# EAGLE board CT_schematic (EAGLE 7.6.0)

Size 100 x 80 mm. Coordinates in mm from the lower left corner, seen from the top.
Outline: 0,0 100,0 100,80 0,80 0,0
Copper layers (1*16): Top 0.035mm / dielectric 1.5mm / Bottom 0.035mm
Design rules "default": minimum track width 10mil, minimum drill 24mil, track to track 8mil, track to pad 8mil, pad to pad 8mil, via to via 8mil, smd to smd 8mil, copper to edge 40mil, drill to drill 8mil, minimum pad ring 10mil, minimum via ring 8mil, stop-mask expansion 4mil, vias tented up to drill 0mil, thermal gap 10mil

## Footprints (pad centres in the part's own frame; a part is rotated, then mirrored left to right if it is on the bottom)
C0603 = smd 0.8 x 0.8: 1 -0.762,0; 2 0.762,0
C0402 = smd 0.5 x 0.5: 1 -0.508,0; 2 0.508,0
C1210 = smd 1.2 x 2.5: 1 -1.524,0; 2 1.524,0
C0805 = smd 1.2 x 1.3: 1 -1.016,0; 2 1.016,0
C1206 = smd 1.3 x 1.6: 1 -1.524,0; 2 1.524,0
EXV-9H = smd 3.505 x 1.676: 1 -2.857,0; 2 2.857,0
L0603 = smd 0.8 x 0.8: 1 -0.762,0; 2 0.762,0
R0603 = smd 0.8 x 0.8: 1 -0.762,0; 2 0.762,0
DR1040 = smd 1.6 x 3.2: 1 -4.458,0; 2 4.458,0
PJ-037B_PACKAGE = drill 3.7 square: 1 12,0 | drill 3.2 square: 2 6,0
LQFP176 = smd 0.3 x 1.2: 1 -10.75,-12.75; 2 -10.25,-12.75; 3 -9.75,-12.75; 4 -9.25,-12.75; 5 -8.75,-12.75; 6 -8.25,-12.75; 7 -7.75,-12.75; 8 -7.25,-12.75; 9 -6.75,-12.75; 10 -6.25,-12.75; 11 -5.75,-12.75; 12 -5.25,-12.75; 13 -4.75,-12.75; 14 -4.25,-12.75; 15 -3.75,-12.75; 16 -3.25,-12.75; 17 -2.75,-12.75; 18 -2.25,-12.75; 19 -1.75,-12.75; 20 -1.25,-12.75; 21 -0.75,-12.75; 22 -0.25,-12.75; 23 0.25,-12.75; 24 0.75,-12.75; 25 1.25,-12.75; 26 1.75,-12.75; 27 2.25,-12.75; 28 2.75,-12.75; 29 3.25,-12.75; 30 3.75,-12.75; 31 4.25,-12.75; 32 4.75,-12.75; 33 5.25,-12.75; 34 5.75,-12.75; 35 6.25,-12.75; 36 6.75,-12.75; 37 7.25,-12.75; 38 7.75,-12.75; 39 8.25,-12.75; 40 8.75,-12.75; 41 9.25,-12.75; 42 9.75,-12.75; 43 10.25,-12.75; 44 10.75,-12.75; 89 10.75,12.75; 90 10.25,12.75; 91 9.75,12.75; 92 9.25,12.75; 93 8.75,12.75; 94 8.25,12.75; 95 7.75,12.75; 96 7.25,12.75; 97 6.75,12.75; 98 6.25,12.75; 99 5.75,12.75; 100 5.25,12.75; 101 4.75,12.75; 102 4.25,12.75; 103 3.75,12.75; 104 3.25,12.75; 105 2.75,12.75; 106 2.25,12.75; 107 1.75,12.75; 108 1.25,12.75; 109 0.75,12.75; 110 0.25,12.75; 111 -0.25,12.75; 112 -0.75,12.75; 113 -1.25,12.75; 114 -1.75,12.75; 115 -2.25,12.75; 116 -2.75,12.75; 117 -3.25,12.75; 118 -3.75,12.75; 119 -4.25,12.75; 120 -4.75,12.75; 121 -5.25,12.75; 122 -5.75,12.75; 123 -6.25,12.75; 124 -6.75,12.75; 125 -7.25,12.75; 126 -7.75,12.75; 127 -8.25,12.75; 128 -8.75,12.75; 129 -9.25,12.75; 130 -9.75,12.75; 131 -10.25,12.75; 132 -10.75,12.75 | smd 1.2 x 0.3: 45 12.75,-10.75; 46 12.75,-10.25; 47 12.75,-9.75; 48 12.75,-9.25; 49 12.75,-8.75; 50 12.75,-8.25; 51 12.75,-7.75; 52 12.75,-7.25; 53 12.75,-6.75; 54 12.75,-6.25; 55 12.75,-5.75; 56 12.75,-5.25; 57 12.75,-4.75; 58 12.75,-4.25; 59 12.75,-3.75; 60 12.75,-3.25; 61 12.75,-2.75; 62 12.75,-2.25; 63 12.75,-1.75; 64 12.75,-1.25; 65 12.75,-0.75; 66 12.75,-0.25; 67 12.75,0.25; 68 12.75,0.75; 69 12.75,1.25; 70 12.75,1.75; 71 12.75,2.25; 72 12.75,2.75; 73 12.75,3.25; 74 12.75,3.75; 75 12.75,4.25; 76 12.75,4.75; 77 12.75,5.25; 78 12.75,5.75; 79 12.75,6.25; 80 12.75,6.75; 81 12.75,7.25; 82 12.75,7.75; 83 12.75,8.25; 84 12.75,8.75; 85 12.75,9.25; 86 12.75,9.75; 87 12.75,10.25; 88 12.75,10.75; 133 -12.75,10.75; 134 -12.75,10.25; 135 -12.75,9.75; 136 -12.75,9.25; 137 -12.75,8.75; 138 -12.75,8.25; 139 -12.75,7.75; 140 -12.75,7.25; 141 -12.75,6.75; 142 -12.75,6.25; 143 -12.75,5.75; 144 -12.75,5.25; 145 -12.75,4.75; 146 -12.75,4.25; 147 -12.75,3.75; 148 -12.75,3.25; 149 -12.75,2.75; 150 -12.75,2.25; 151 -12.75,1.75; 152 -12.75,1.25; 153 -12.75,0.75; 154 -12.75,0.25; 155 -12.75,-0.25; 156 -12.75,-0.75; 157 -12.75,-1.25; 158 -12.75,-1.75; 159 -12.75,-2.25; 160 -12.75,-2.75; 161 -12.75,-3.25; 162 -12.75,-3.75; 163 -12.75,-4.25; 164 -12.75,-4.75; 165 -12.75,-5.25; 166 -12.75,-5.75; 167 -12.75,-6.25; 168 -12.75,-6.75; 169 -12.75,-7.25; 170 -12.75,-7.75; 171 -12.75,-8.25; 172 -12.75,-8.75; 173 -12.75,-9.25; 174 -12.75,-9.75; 175 -12.75,-10.25; 176 -12.75,-10.75
QFN-32 = smd 0.6 x 0.3: 1 -2.3,1.75; 2 -2.3,1.25; 3 -2.3,0.75; 4 -2.3,0.25; 5 -2.3,-0.25; 6 -2.3,-0.75; 7 -2.3,-1.25; 8 -2.3,-1.75; 17 2.3,-1.75; 18 2.3,-1.25; 19 2.3,-0.75; 20 2.3,-0.25; 21 2.3,0.25; 22 2.3,0.75; 23 2.3,1.25; 24 2.3,1.75 | smd 0.3 x 0.6: 9 -1.75,-2.3; 10 -1.25,-2.3; 11 -0.75,-2.3; 12 -0.25,-2.3; 13 0.25,-2.3; 14 0.75,-2.3; 15 1.25,-2.3; 16 1.75,-2.3; 25 1.75,2.3; 26 1.25,2.3; 27 0.75,2.3; 28 0.25,2.3; 29 -0.25,2.3; 30 -0.75,2.3; 31 -1.25,2.3; 32 -1.75,2.3 | smd 3.2 x 3.2: EXP 0,0
7498011122R = smd 0.71 x 2.29: 1 -3.545,-3.18; 2 -2.525,-3.18; 3 -1.505,-3.18; 4 -0.485,-3.18; 5 0.535,-3.18; 6 1.555,-3.18; 8 3.595,-3.18; 9 5.635,-3.18; 10 6.655,-3.18; 11 -6.605,-3.18; 12 -5.585,-3.18 | smd 1.4 x 2.54: 13 -8.51,10.2; 14 8.51,10.2 | hole 1.4: -3.5,0; 3.5,0
SOT-23-8 = smd 0.4 x 1.2: 1 -0.975,-1.3; 2 -0.325,-1.3; 3 0.325,-1.3; 4 0.975,-1.3; 5 0.975,1.3; 6 0.325,1.3; 7 -0.325,1.3; 8 -0.975,1.3
182-009-MALE = drill 1.194 pad 1.524 octagon: 1 -5.537,10.923; 2 -2.769,10.923; 3 0,10.923; 4 2.769,10.923; 5 5.537,10.923; 6 -4.153,8.08; 7 -1.384,8.08; 8 1.384,8.08; 9 4.153,8.08 | hole 3.048: -12.446,9.501; 12.446,9.501
DFN8-S = smd 0.6 x 0.4: 1 -2.69,1.905; 2 -2.69,0.635; 3 -2.69,-0.635; 4 -2.69,-1.905; 5 2.69,-1.905; 6 2.69,-0.635; 7 2.69,0.635; 8 2.69,1.905
ASEK = smd 1.4 x 1: 1 -1.1,-0.8; 2 1.1,-0.8; 3 1.1,0.8; 4 -1.1,0.8
ASFL1 = smd 1.7 x 1.5: 1 -1.27,-1.1; 2 1.27,-1.1; 3 1.27,1.1; 4 -1.27,1.1
IDT74FCT38072 = smd 0.51 x 1: 1 0,0; 2 1.27,0; 3 2.54,0; 4 3.81,0; 5 3.81,4.95; 6 2.54,4.95; 7 1.27,4.95; 8 0,4.95
WSON-8 = smd 0.3 x 0.6: 1 -0.75,0; 2 0.05,0; 3 0.85,0; 4 1.65,0; 5 1.65,3.8; 6 0.85,3.8; 7 0.05,3.8; 8 -0.75,3.8 | smd 3 x 2.6: PAD 0.45,1.9
HTSSOP14 = smd 1.676 x 0.356: 1 -2.8,1.95; 2 -2.8,1.3; 3 -2.8,0.65; 4 -2.8,0; 5 -2.8,-0.65; 6 -2.8,-1.3; 7 -2.8,-1.95; 8 2.8,-1.95; 9 2.8,-1.3; 10 2.8,-0.65; 11 2.8,0; 12 2.8,0.65; 13 2.8,1.3; 14 2.8,1.95 | smd 3 x 5: 15 0,0 | drill 0.4 pad 0.45: P$1 -0.75,1.5; P$2 0.75,1.5; P$3 -0.75,0; P$4 0.8,0; P$5 -0.75,-1.5; P$6 0.9,-1.5
SON-6 = smd 0.55 x 0.3: 1 -0.355,0.5 | smd 0.52 x 0.3: 2 -0.37,0; 3 -0.37,-0.5; 4 0.37,-0.5; 5 0.37,0; 6 0.37,0.5
SW_4-1437565-2 = smd 1.4 x 2.1: 1 -2.23,4.55; 2 -2.23,-4.55; 3 2.23,4.55; 4 2.23,-4.55
LGM67K-G1J2-24-Z = smd 0.8 x 1.4: A -2,0; C 0,0
NC7SZ125M5X = smd 1.3 x 0.7: 1 -1.3,0.95; 2 -1.3,0; 3 -1.3,-0.95; 4 1.3,-0.95; 5 1.3,0.95

## Placement (x,y rotation side)
C1  1e-06  [C0603]  -54.61,85.09 0 top  (outside the outline)
C2  1e-07  [C0603]  -58.42,85.09 0 top  (outside the outline)
C3  1e-07  [C0603]  -62.23,85.09 0 top  (outside the outline)
C4  1e-07  [C0603]  -66.04,85.09 0 top  (outside the outline)
C5  1e-07  [C0603]  -69.85,85.09 0 top  (outside the outline)
C6  1e-07  [C0603]  -73.66,85.09 0 top  (outside the outline)
C7  1e-07  [C0603]  -77.47,85.09 0 top  (outside the outline)
C8  1e-07  [C0603]  -81.28,85.09 0 top  (outside the outline)
C9  1e-07  [C0603]  -85.09,85.09 0 top  (outside the outline)
C10  1e-07  [C0603]  -15.24,90.17 0 top  (outside the outline)
C11  1e-07  [C0603]  -19.05,90.17 0 top  (outside the outline)
C12  1e-07  [C0603]  -22.86,90.17 0 top  (outside the outline)
C13  1e-07  [C0603]  -26.67,90.17 0 top  (outside the outline)
C14  1e-07  [C0603]  -30.48,90.17 0 top  (outside the outline)
C15  1e-07  [C0603]  -34.29,90.17 0 top  (outside the outline)
C16  1e-07  [C0603]  -38.1,90.17 0 top  (outside the outline)
C17  1e-07  [C0603]  -41.91,90.17 0 top  (outside the outline)
C18  4.7e-06  [C0603]  -39.37,85.09 0 top  (outside the outline)
C19  2.2e-06  [C0603]  -43.18,85.09 0 top  (outside the outline)
C20  2.2e-06  [C0603]  -46.99,85.09 0 top  (outside the outline)
C21  1e-08  [C0603]  -45.72,90.17 0 top  (outside the outline)
C22  1e-06  [C0603]  -49.53,90.17 0 top  (outside the outline)
C23  2.2e-08  [C0402]  -73.66,95.25 0 top  (outside the outline)
C24  1e-06  [C0603]  -53.34,90.17 0 top  (outside the outline)
C25  1e-06  [C0603]  -57.15,90.17 0 top  (outside the outline)
C26  4.7e-10  [C0603]  -50.8,85.09 0 top  (outside the outline)
C27  1e-06  [C0603]  -60.96,90.17 0 top  (outside the outline)
C28  1e-07  [C0402]  -81.28,95.25 0 top  (outside the outline)
C29  1e-08  [C0402]  -85.09,95.25 0 top  (outside the outline)
C30  1e-08  [C0402]  -88.9,95.25 0 top  (outside the outline)
C31  1e-08  [C0402]  -15.24,100.33 0 top  (outside the outline)
C32  1e-08  [C0402]  -19.05,100.33 0 top  (outside the outline)
C33  1e-08  [C0402]  -22.86,100.33 0 top  (outside the outline)
C34  1e-05  [C1210]  -29.21,73.66 0 top  (outside the outline)
C35  1e-05  [C0805]  -77.47,73.66 0 top  (outside the outline)
C36  1e-06  [C0603]  -64.77,90.17 0 top  (outside the outline)
C37  3.3e-09  [C0402]  -77.47,95.25 0 top  (outside the outline)
C38  1e-07  [C0402]  -26.67,100.33 0 top  (outside the outline)
C39  2.2e-05  [C1210]  -35.56,73.66 0 top  (outside the outline)
C40  2.2e-05  [C1210]  -41.91,73.66 0 top  (outside the outline)
C41  1e-05  [C1206]  -48.26,73.66 0 top  (outside the outline)
C42  1e-05  [C1206]  -54.61,73.66 0 top  (outside the outline)
C43  1e-07  [C0402]  -30.48,100.33 0 top  (outside the outline)
C44  0.0001  [EXV-9H]  -55.88,66.04 0 top  (outside the outline)
C45  0.0001  [EXV-9H]  -67.31,66.04 0 top  (outside the outline)
C46  1e-08  [C0402]  -34.29,100.33 0 top  (outside the outline)
C47  1e-08  [C0402]  -38.1,100.33 0 top  (outside the outline)
F1  240.0  [L0603]  -68.58,90.17 0 top  (outside the outline)
I1  97.0  [R0603]  -72.39,90.17 0 top  (outside the outline)
I5  5.2e-06  [DR1040]  -19.05,55.88 0 top  (outside the outline)
J1  PJ-037B  [PJ-037B_PACKAGE]  -67.31,35.56 0 top  (outside the outline)
R2  1000.0  [R0603]  -76.2,90.17 0 top  (outside the outline)
R4  4700.0  [R0603]  -80.01,90.17 0 top  (outside the outline)
R5  4700.0  [R0603]  -83.82,90.17 0 top  (outside the outline)
R6  2200.0  [R0603]  -87.63,90.17 0 top  (outside the outline)
R7  2200.0  [R0603]  -15.24,95.25 0 top  (outside the outline)
R8  2200.0  [R0603]  -19.05,95.25 0 top  (outside the outline)
R9  2200.0  [R0603]  -22.86,95.25 0 top  (outside the outline)
R10  10000.0  [R0603]  -35.56,80.01 0 top  (outside the outline)
R11  0.1  [R0603]  -26.67,95.25 0 top  (outside the outline)
R12  0.1  [R0603]  -30.48,95.25 0 top  (outside the outline)
R13  200.0  [R0603]  -34.29,95.25 0 top  (outside the outline)
R14  200.0  [R0603]  -38.1,95.25 0 top  (outside the outline)
R15  12100.0  [R0603]  -40.64,80.01 0 top  (outside the outline)
R16  49.9  [R0603]  -41.91,95.25 0 top  (outside the outline)
R17  49.9  [R0603]  -45.72,95.25 0 top  (outside the outline)
R18  49.9  [R0603]  -49.53,95.25 0 top  (outside the outline)
R19  10000.0  [R0603]  -45.72,80.01 0 top  (outside the outline)
R20  49.9  [R0603]  -53.34,95.25 0 top  (outside the outline)
R21  10000.0  [R0603]  -50.8,80.01 0 top  (outside the outline)
R22  10000.0  [R0603]  -55.88,80.01 0 top  (outside the outline)
R23  10000.0  [R0603]  -60.96,80.01 0 top  (outside the outline)
R24  10000.0  [R0603]  -66.04,80.01 0 top  (outside the outline)
R25  10000.0  [R0603]  -71.12,80.01 0 top  (outside the outline)
R26  10000.0  [R0603]  -76.2,80.01 0 top  (outside the outline)
R27  10000.0  [R0603]  -81.28,80.01 0 top  (outside the outline)
R28  120.0  [R0603]  -57.15,95.25 0 top  (outside the outline)
R29  100000.0  [R0603]  -15.24,80.01 0 top  (outside the outline)
R30  10000.0  [R0603]  -86.36,80.01 0 top  (outside the outline)
R31  10000.0  [R0603]  -15.24,85.09 0 top  (outside the outline)
R32  10000.0  [R0603]  -20.32,85.09 0 top  (outside the outline)
R33  100000.0  [R0603]  -20.32,80.01 0 top  (outside the outline)
R34  200.0  [R0603]  -60.96,95.25 0 top  (outside the outline)
R35  1000.0  [R0603]  -64.77,95.25 0 top  (outside the outline)
R36  71007.101651032  [R0603]  -86.36,73.66 0 top  (outside the outline)
R37  22000.0  [R0603]  -25.4,85.09 0 top  (outside the outline)
R38  10000.0  [R0603]  -30.48,85.09 0 top  (outside the outline)
R39  10000.0  [R0603]  -35.56,85.09 0 top  (outside the outline)
R40  9100.0  [R0603]  -68.58,95.25 0 top  (outside the outline)
R41  680000.0  [R0603]  -25.4,80.01 0 top  (outside the outline)
R42  120000.0  [R0603]  -30.48,80.01 0 top  (outside the outline)
U1  STM32F217IET6  [LQFP176]  -45.72,13.97 0 top  (outside the outline)
U2  LAN8710AI-EZK  [QFN-32]  -46.99,55.88 0 top  (outside the outline)
U3  7498011122R  [7498011122R]  -22.86,7.62 0 top  (outside the outline)
U4  MAX3051EKA+T  [SOT-23-8]  -59.69,72.39 0 top  (outside the outline)
U5  182-009-113R531  [182-009-MALE]  -36.83,34.29 0 top  (outside the outline)
U6  24AA512-I/MF  [DFN8-S]  -34.29,55.88 0 top  (outside the outline)
U7  ASEK-32.768KHz-ECST  [ASEK]  -46.99,66.04 0 top  (outside the outline)
U8  ASFL1-25MHZ-NCS  [ASFL1]  -85.09,54.61 0 top  (outside the outline)
U9  idt74fct38072  [IDT74FCT38072]  -29.21,63.5 0 top  (outside the outline)
U10  LP3878SDX-ADJ/NOPB  [WSON-8]  -68.58,53.34 0 top  (outside the outline)
U11  tps54325PWP  [HTSSOP14]  -77.47,64.77 0 top  (outside the outline)
U12  TPS3895ADRYR  [SON-6]  -40.64,99.06 0 top  (outside the outline)
U13  4-1437565-2  [SW_4-1437565-2]  -83.82,34.29 0 top  (outside the outline)
U14  Q65110A2395  [LGM67K-G1J2-24-Z]  -17.78,73.66 0 top  (outside the outline)
U15  nc7sz125m5x  [NC7SZ125M5X]  -64.77,72.39 0 top  (outside the outline)
U16  nc7sz125m5x  [NC7SZ125M5X]  -71.12,72.39 0 top  (outside the outline)

## Library data of the parts
C1-C47 F1 I1 I5 J1 R2 R4-R42 U1-U16 = circuit_tree

## Nets
CLK_U1_9: U1.9 U7.3
CLK_U1_29: U1.29 U9.7
CLK_U2_5: U2.5 U9.6
CLK_U9_3: U8.3 U9.3
GND: C1.2 C2.2 C3.2 C4.2 C5.2 C6.2 C7.2 C8.2 C9.2 C10.2 C11.2 C12.2 C13.2 C14.2 C15.2 C16.2 C17.2 C18.2 C19.2 C20.2 C21.2 C22.2 C23.2 C24.2 C25.2 C26.2 C27.2 C28.2 C29.2 C30.2 C31.2 C32.2 C33.2 C34.2 C35.2 C36.2 C37.2 C39.2 C40.2 C41.2 C42.2 C43.2 C44.2 C45.2 C46.2 C47.2 J1.2 R2.2 R10.2 R11.2 R12.2 R13.2 R15.2 R26.2 R27.2 R29.2 R31.2 R32.2 R35.2 R37.2 R40.2 R42.2 U1.14 U1.22 U1.37 U1.48 U1.61 U1.71 U1.90 U1.102 U1.113 U1.126 U1.135 U1.148 U1.158 U2.EXP U4.2 U5.5 U6.4 U6.7 U7.2 U8.2 U9.4 U9.5 U9.8 U10.3 U10.PAD U11.5 U11.8 U11.9 U11.15 U12.2 U14.C U15.1 U15.3 U16.1 U16.3
NET_U1_31: R5.1 U1.31 U16.4
NET_U1_33: R8.1 U1.33 U2.17
NET_U1_39: C21.1 C22.1 F1.1 U1.38 U1.39
NET_U1_42: R9.1 U1.42 U2.16
NET_U1_81: C19.1 U1.81
NET_U1_125: C20.1 U1.125
NET_U1_164: R6.1 U1.164 U6.6
NET_U1_165: R7.1 U1.165 U6.5
NET_U1_166: R10.1 U1.166
NET_U1_175: U14.A
NET_U1_176: U13.3 U13.4
NET_U2_1: C24.1 I1.1 R16.2 R17.2 R18.2 R20.2 R21.2 U2.1 U2.27 U3.2 U3.9
NET_U2_3: R21.1 U2.3
NET_U2_18: R19.1 U2.18
NET_U2_19: R4.1 U2.19 U15.4
NET_U2_32: R15.1 U2.32
NET_U3_1: R16.1 U2.29 U3.1
NET_U3_3: R14.2 R17.1 U2.28 U3.3
NET_U3_4: R18.1 U2.31 U3.4
NET_U3_5: C23.1 U3.2 U3.5
NET_U3_6: R20.1 U2.30 U3.6
NET_U3_8: R12.1 U3.8
NET_U3_10: R14.1 U3.10
NET_U3_11: U2.2 U3.11
NET_U3_12: R13.1 U3.12
NET_U3_13: R11.1 U3.13 U3.14
NET_U4_6: R28.2 U4.6
NET_U4_8: R29.1 U4.8
NET_U5_2: R28.2 U4.6 U5.2
NET_U5_3: R28.1 U4.7 U5.3
NET_U6_1: R30.1 U6.1
NET_U6_2: R31.1 U6.2
NET_U6_3: R32.1 U6.3
NET_U10_1: C33.1 U10.1
NET_U10_6: R34.2 R35.1 U10.6
NET_U10_8: R33.1 U10.8
NET_U11_2: R36.2 R37.1 U11.2
NET_U11_3: C36.1 U11.3
NET_U11_4: C37.1 U11.4
NET_U11_10: C38.1 I5.1 U11.10 U11.11
NET_U11_12: C38.2 U11.12
NET_U12_1: R39.1 R40.1 U12.1
NET_U12_3: R41.2 R42.1 U12.3
NET_U12_4: R38.1 U12.4 U15.2 U16.2
NET_U13_1: R2.1 U13.1 U13.2
PROC_CAN1_RX: U1.11 U4.4
PROC_CAN1_TX: U1.123 U4.1
PROC_ETH_COL: R24.1 U1.44 U2.15
PROC_ETH_CRS: U1.40 U2.14
PROC_ETH_RX_CLK: R26.1 U1.41 U2.7
PROC_ETH_RX_DV: U1.53 U2.26
PROC_ETH_RX_ER: R25.1 U1.12 U2.13
PROC_ETH_RXD0: R22.1 U1.54 U2.11
PROC_ETH_RXD1: R23.1 U1.55 U2.10
PROC_ETH_RXD2: U1.56 U2.9
PROC_ETH_RXD3: R27.1 U1.57 U2.8
PROC_ETH_TX_CLK: U1.35 U2.20
PROC_ETH_TX_EN: U1.80 U2.21
PROC_ETH_TXD0: U1.92 U2.22
PROC_ETH_TXD1: U1.93 U2.23
PROC_ETH_TXD2: U1.34 U2.24
PROC_ETH_TXD3: U1.1 U2.25
VCC_S1_11V4: C34.1 C41.1 C42.1 C44.1 C45.1 J1.1 R33.2 U10.4 U11.7 U11.13 U11.14
VCC_TIER1_1V2: C25.1 C26.1 C35.1 R34.1 U2.6 U10.5
VCC_TIER1_3V3: C1.1 C2.1 C3.1 C4.1 C5.1 C6.1 C7.1 C8.1 C9.1 C10.1 C11.1 C12.1 C13.1 C14.1 C15.1 C16.1 C17.1 C18.1 C27.1 C28.1 C29.1 C30.1 C31.1 C32.1 C39.1 C40.1 C43.1 C46.1 C47.1 F1.2 I1.2 I5.2 R4.2 R5.2 R6.2 R7.2 R8.2 R9.2 R19.2 R22.2 R23.2 R24.2 R25.2 R30.2 R36.1 R38.2 R39.2 R41.1 U1.6 U1.15 U1.23 U1.36 U1.49 U1.62 U1.72 U1.82 U1.91 U1.103 U1.114 U1.127 U1.136 U1.149 U1.159 U1.172 U2.12 U4.3 U6.8 U7.4 U8.4 U9.1 U9.2 U11.1 U12.6 U15.5 U16.5

## Tracks (layer width: path | path; a pad name or v marks a point on that pad's centre or on a via)
CLK_U1_9  (1 unrouted)
CLK_U1_29  (1 unrouted)
CLK_U2_5  (1 unrouted)
CLK_U9_3  (1 unrouted)
GND  (96 unrouted)
NET_U1_31  (2 unrouted)
NET_U1_33  (2 unrouted)
NET_U1_39  (4 unrouted)
NET_U1_42  (2 unrouted)
NET_U1_81  (1 unrouted)
NET_U1_125  (1 unrouted)
NET_U1_164  (2 unrouted)
NET_U1_165  (2 unrouted)
NET_U1_166  (1 unrouted)
NET_U1_176  (1 unrouted)
NET_U2_1  (10 unrouted)
NET_U2_3  (1 unrouted)
NET_U2_18  (1 unrouted)
NET_U2_19  (2 unrouted)
NET_U2_32  (1 unrouted)
NET_U3_1  (2 unrouted)
NET_U3_3  (3 unrouted)
NET_U3_4  (2 unrouted)
NET_U3_5  (2 unrouted)
NET_U3_6  (2 unrouted)
NET_U3_8  (1 unrouted)
NET_U3_10  (1 unrouted)
NET_U3_11  (1 unrouted)
NET_U3_12  (1 unrouted)
NET_U3_13  (2 unrouted)
NET_U4_6  (1 unrouted)
NET_U4_8  (1 unrouted)
NET_U5_2  (2 unrouted)
NET_U5_3  (2 unrouted)
NET_U6_1  (1 unrouted)
NET_U6_2  (1 unrouted)
NET_U6_3  (1 unrouted)
NET_U10_1  (1 unrouted)
NET_U10_6  (2 unrouted)
NET_U10_8  (1 unrouted)
NET_U11_2  (2 unrouted)
NET_U11_3  (1 unrouted)
NET_U11_4  (1 unrouted)
NET_U11_10  (3 unrouted)
NET_U11_12  (1 unrouted)
NET_U12_1  (2 unrouted)
NET_U12_3  (2 unrouted)
NET_U12_4  (3 unrouted)
NET_U13_1  (2 unrouted)
PROC_CAN1_RX  (1 unrouted)
PROC_CAN1_TX  (1 unrouted)
PROC_ETH_COL  (2 unrouted)
PROC_ETH_CRS  (1 unrouted)
PROC_ETH_RX_CLK  (2 unrouted)
PROC_ETH_RX_DV  (1 unrouted)
PROC_ETH_RX_ER  (2 unrouted)
PROC_ETH_RXD0  (2 unrouted)
PROC_ETH_RXD1  (2 unrouted)
PROC_ETH_RXD2  (1 unrouted)
PROC_ETH_RXD3  (2 unrouted)
PROC_ETH_TX_CLK  (1 unrouted)
PROC_ETH_TX_EN  (1 unrouted)
PROC_ETH_TXD0  (1 unrouted)
PROC_ETH_TXD1  (1 unrouted)
PROC_ETH_TXD2  (1 unrouted)
PROC_ETH_TXD3  (1 unrouted)
VCC_S1_11V4  (10 unrouted)
VCC_TIER1_1V2  (5 unrouted)
VCC_TIER1_3V3  (74 unrouted)